# EAGLE board Input interface (EAGLE 7.1.0)
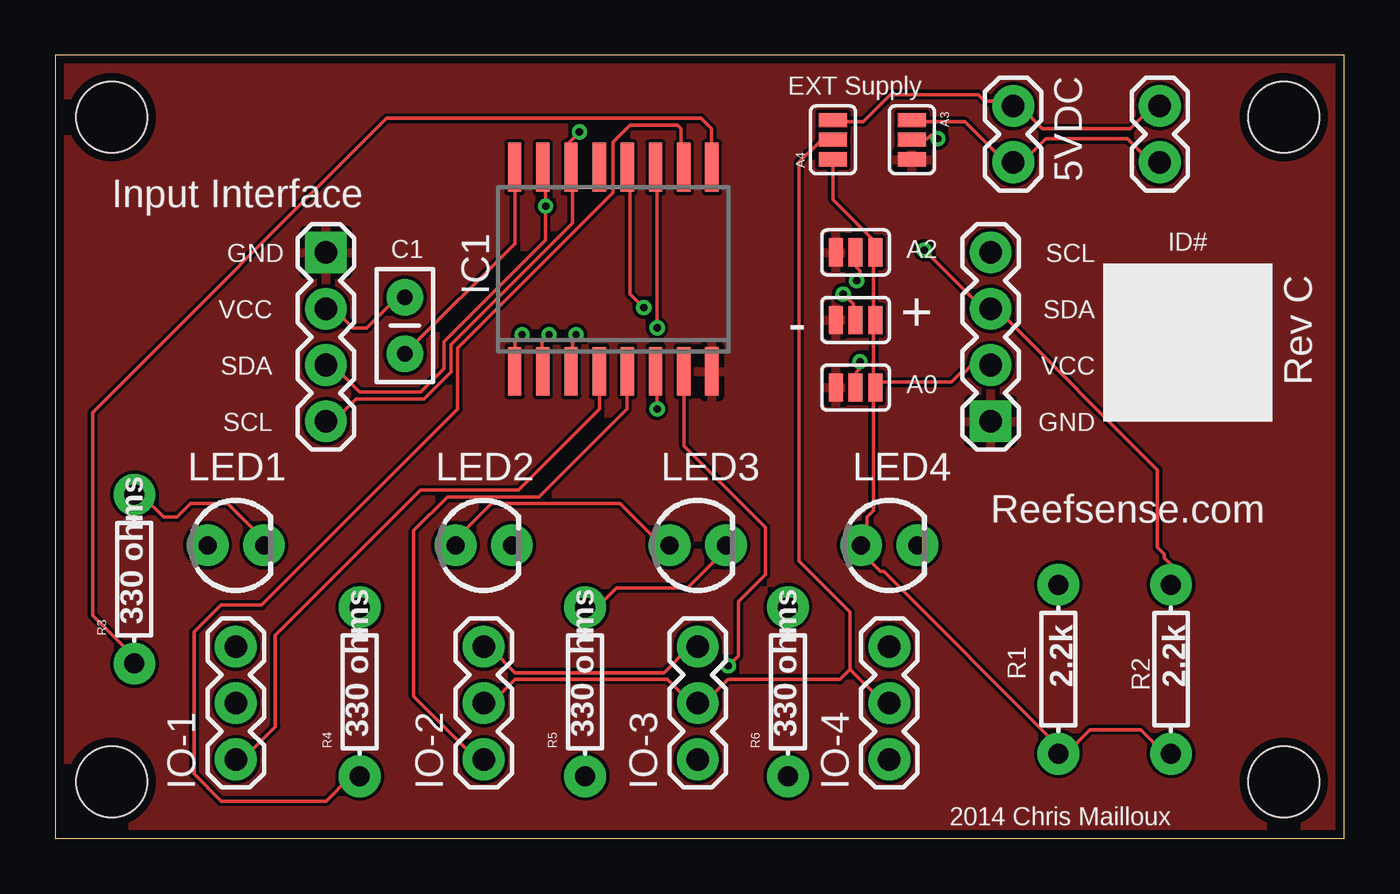
[diagram p0: board, top side]
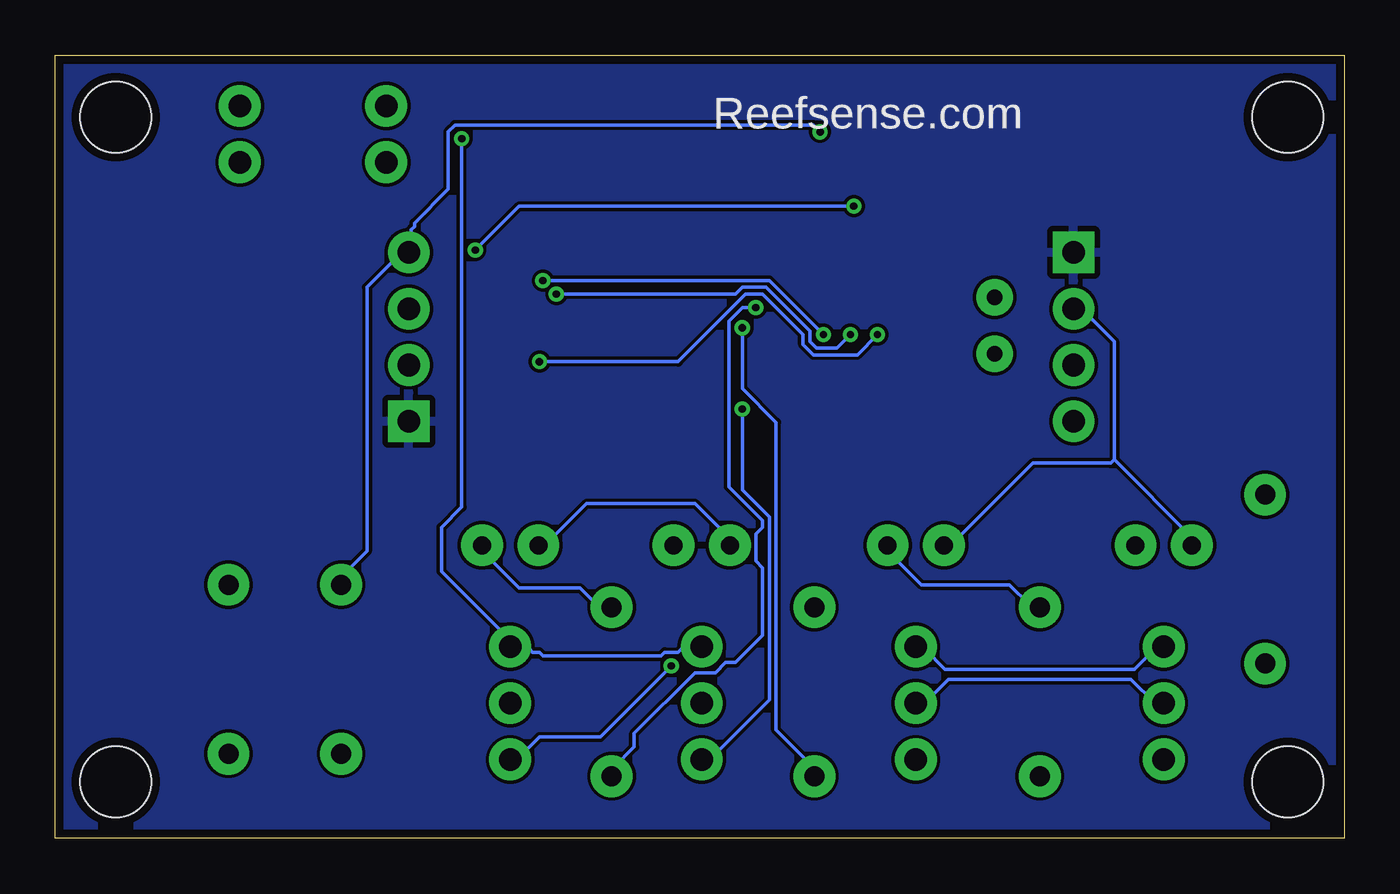
[diagram p1: board, bottom side, seen from below]

Size 58.09 x 35.3 mm. Coordinates in mm from the lower left corner, seen from the top.
Outline: 0,0 58.09,0 58.09,35.3 0,35.3 0,0
Copper layers (1*16): Top 0.0356mm / dielectric 1.5011mm / Bottom 0.0356mm
Design rules "LaenPCBOrder": minimum track width 6mil, minimum drill 13mil, track to track 6mil, track to pad 6mil, pad to pad 6mil, via to via 6mil, smd to smd 6mil, copper to edge 15mil, drill to drill 6mil, minimum pad ring 7mil, minimum via ring 7mil, stop-mask expansion 3mil, vias tented up to drill 0mil, thermal gap 10mil
Holes 3.2 mm at 2.54,32.51 55.37,32.51 55.37,2.54 2.54,2.54

## Footprints (pad centres in the part's own frame; a part is rotated, then mirrored left to right if it is on the bottom)
1X02 = drill 1.016 pad 1.88: 1 0,0; 2 2.54,0
SJ_3 = smd 0.635 x 1.27: 1 -0.889,0; 2 0,0; 3 0.889,0
CAP-PTH-SMALL2 = drill 0.7 pad 1.651: 1 0,0; 2 2.54,0
SO16W = smd 0.6 x 2.2: 1 -4.445,-4.6; 2 -3.175,-4.6; 3 -1.905,-4.6; 4 -0.635,-4.6; 5 0.635,-4.6; 6 1.905,-4.6; 7 3.175,-4.6; 8 4.445,-4.6; 9 4.445,4.6; 10 3.175,4.6; 11 1.905,4.6; 12 0.635,4.6; 13 -0.635,4.6; 14 -1.905,4.6; 15 -3.175,4.6; 16 -4.445,4.6
1X03 = drill 1.016 pad 1.88: 1 0,0; 2 2.54,0; 3 5.08,0
1X04 = drill 1.016 pad 1.88 square: 1 0,0 | drill 1.016 pad 1.88: 2 2.54,0; 3 5.08,0; 4 7.62,0
LED3MM = drill 0.813 pad 1.88: A -1.27,0; K 1.27,0
AXIAL-0.3 = drill 0.9 pad 1.88: P$1 -3.81,0; P$2 3.81,0

## Placement (x,y rotation side)
5VDC  +  [1X02]  43.18,33.02 270 top
5VDC1  +  [1X02]  49.78,33.02 270 top
A0  [SJ_3]  36.07,20.32 0 top
A1  [SJ_3]  36.07,23.37 0 top
A2  [SJ_3]  36.07,26.42 0 top
A3  [SJ_3]  38.61,31.5 270 top
A4  [SJ_3]  35.05,31.5 90 top
C1  [CAP-PTH-SMALL2]  15.75,24.38 270 top
IC1  PCF8574T  [SO16W]  25.15,25.65 0 top
IO-1  [1X03]  8.13,3.56 90 top
IO-2  [1X03]  19.3,3.56 90 top
IO-3  [1X03]  28.96,3.56 90 top
IO-4  [1X03]  37.59,3.56 90 top
JP1  [1X04]  12.19,26.42 270 top
JP2  [1X04]  42.16,18.8 90 top
LED1  [LED3MM]  8.13,13.21 0 top
LED2  [LED3MM]  19.3,13.21 0 top
LED3  [LED3MM]  28.96,13.21 0 top
LED4  [LED3MM]  37.59,13.21 0 top
R1  2.2k  [AXIAL-0.3]  45.21,7.62 270 top
R2  2.2k  [AXIAL-0.3]  50.29,7.62 270 top
R3  330 ohms  [AXIAL-0.3]  3.56,11.68 90 top
R4  330 ohms  [AXIAL-0.3]  13.72,6.6 90 top
R5  330 ohms  [AXIAL-0.3]  23.88,6.6 90 top
R6  330 ohms  [AXIAL-0.3]  33.02,6.6 90 top

## Library data of the parts
5VDC 5VDC1 IO-1-IO-4 JP1 JP2 = SparkFun-Connectors
A0 A1-A4 = SparkFun-Retired
C1 = SparkFun-Capacitors
IC1 = micro-philips
LED1-LED4 = SparkFun-LED
R1-R6 = SparkFun-Resistors

## Nets
5V: A0.3 A1.3 A2.3 A4.1 C1.1 JP1.2 JP2.2 LED1.A LED2.A LED3.A LED4.A R1.P$2 R2.P$2
GND: A0.1 A1.1 A2.1 A3.3 IC1.8 JP1.1 JP2.1
N$1: IC1.4 IO-1.1
N$2: IC1.5 IO-2.1
N$3: IC1.6 IO-3.1
N$4: A0.2 IC1.1
N$5: IC1.14 JP1.4 JP2.4 R1.P$1
N$6: IC1.15 JP1.3 JP2.3 R2.P$1
N$7: A1.2 IC1.2
N$8: C1.2 IC1.16
N$9: A2.2 IC1.3
N$10: IC1.7 IO-4.1
N$11: IC1.9 R3.P$1
N$12: IC1.10 R4.P$1
N$13: IC1.11 R5.P$1
N$14: IC1.12 R6.P$1
N$15: LED1.K R3.P$2
N$16: LED2.K R4.P$2
N$17: LED3.K R5.P$2
N$18: LED4.K R6.P$2
N$19: A4.2 IO-1.2 IO-2.2 IO-3.2 IO-4.2
N$20: 5VDC1.1 5VDC.1 A4.3
N$21: 5VDC1.2 5VDC.2 A3.1
N$22: A3.2 IO-1.3 IO-2.3 IO-3.3 IO-4.3

## Tracks (layer width: path | path; a pad name or v marks a point on that pad's centre or on a via)
5V
  Top 0.152: C1.1 15.39,24.38 14.02,23.01 13.41,23.01 12.65,23.77 12.19,23.77 JP1.2 | 36.88,20.57 36.88,23.32 A1.3 36.88,23.47 36.88,26.36 A2.3 36.88,26.52 36.88,26.98 35.05,28.8 A4.1 | 36.88,20.57 36.88,20.42 A0.3 | JP2.2 41.3,21.34 41,21.03 40.84,21.03 40.39,20.57 36.88,20.57 | 36.88,20.57 A0.3 | R2.P$2 49.99,3.81 48.92,4.88 46.63,4.88 45.57,3.81 R1.P$2 45.11,3.81 45.11,4.27 37.34,12.04 37.19,12.04 36.42,12.8 36.42,13.11 LED4.A 36.42,13.26 36.58,13.41 36.58,14.48 36.88,14.78 36.88,20.27 A0.3 | LED2.A 18.14,13.26 18.14,13.56 19.66,15.09 25.45,15.09 27.28,13.26 27.58,13.26 LED3.A
  Bottom 0.152: LED1.A 6.86,13.56 10.36,17.07 | 10.36,17.07 10.36,22.4 11.73,23.77 12.19,23.77 JP1.2 | 10.36,17.07 10.52,16.92 14.02,16.92 17.68,13.26 17.98,13.26 LED2.A | LED3.A 27.74,13.26 27.74,13.56 29.26,15.09 34.14,15.09 35.97,13.26 36.27,13.26 LED4.A
GND
  pour Top: -2.03,39.62 59.44,39.62 58.42,-1.52 -2.54,-1.02
  pour Bottom: -2.03,-1.02 58.42,-1.02 59.44,39.62 -2.54,39.12
N$1
  Top 0.152: IC1.4 24.54,21.03 24.54,19.36 20.88,15.7 16.46,15.7 9.91,9.14 9.91,5.03 8.53,3.66 8.23,3.66 IO-1.1
N$2
  Top 0.152: IC1.5 25.76,21.03 25.76,19.36 21.79,15.39 17.68,15.39 16.15,13.87 16.15,6.4 18.9,3.66 19.2,3.66 IO-2.1
N$3  (via drill 0.33)
  Top 0.152: v27.13,19.36 27.13,21.03 IC1.6
  Bottom 0.152: v27.13,19.36 27.13,15.7 25.91,14.48 25.91,6.25 28.5,3.66 28.96,3.66 IO-3.1
N$4  (via drill 0.33)
  Top 0.152: v36.27,21.49 36.27,21.18 36.12,21.03 36.12,20.42 A0.2 | v21.03,22.71 20.73,22.4 20.73,21.18 IC1.1
  Bottom 0.152: v36.27,21.49 30.02,21.49 26.98,24.54 26.21,24.54 24.38,22.71 24.38,22.25 23.93,21.79 21.95,21.79 v21.03,22.71
N$5  (via drill 0.33)
  Top 0.152: JP1.4 12.19,18.9 12.65,18.9 13.56,19.81 16.61,19.81 17.83,21.03 17.83,22.25 23.32,27.74 23.32,30.18 IC1.14 23.16,30.33 23.16,31.39 v23.62,31.85
  Bottom 0.152: R1.P$1 45.11,11.43 45.11,11.89 44.04,12.95 44.04,24.84 42.52,26.36 42.22,26.36 JP2.4 42.06,26.52 42.06,27.43 41.91,27.58 41.91,27.74 40.39,29.26 40.39,31.85 40.08,32.16 23.93,32.16 v23.62,31.85
N$6  (via drill 0.33)
  Top 0.152: JP1.3 12.5,21.34 13.72,20.12 16.46,20.12 17.53,21.18 17.53,22.4 22.1,26.98 v22.1,28.5 22.1,30.18 IC1.15 | R2.P$1 50.29,12.34 49.99,12.65 49.99,12.8 49.68,13.11 49.68,16.61 42.52,23.77 42.22,23.77 JP2.3 42.06,23.93 41.76,23.93 v39.17,26.52
  Bottom 0.152: v22.1,28.5 37.19,28.5 v39.17,26.52
N$7  (via drill 0.33)
  Top 0.152: v35.51,24.54 35.97,24.08 35.97,23.47 A1.2 | v22.25,22.71 21.95,22.4 21.95,21.18 IC1.2
  Bottom 0.152: v35.51,24.54 27.43,24.54 27.13,24.84 26.06,24.84 24.08,22.86 24.08,22.4 23.77,22.1 22.86,22.1 v22.25,22.71
N$8
  Top 0.152: C1.2 20.73,26.82 20.73,30.18 IC1.16
N$9  (via drill 0.33)
  Top 0.152: v36.12,25.15 36.27,25.3 36.27,25.6 36.12,25.76 36.12,26.36 A2.2 | v23.47,22.71 23.47,22.55 23.32,22.4 23.32,21.18 IC1.3
  Bottom 0.152: v36.12,25.15 25.91,25.15 v23.47,22.71
N$10  (via drill 0.33)
  Top 0.152: v30.33,7.77 30.79,8.23 30.79,10.67 32,11.89 32,14.02 28.35,17.68 28.35,21.03 IC1.7
  Bottom 0.152: v30.33,7.77 33.53,4.57 36.27,4.57 37.19,3.66 37.49,3.66 IO-4.1
N$11
  Top 0.152: IC1.9 29.57,30.33 29.57,32 29.11,32.46 14.94,32.46 1.68,19.2 1.68,10.06 3.5,8.23 3.5,7.92 R3.P$1
N$12
  Top 0.152: IC1.10 28.19,30.33 28.19,32 28.04,32.16 25.91,32.16 25.15,31.39 25.15,29.11 18.14,22.1 18.14,19.36 9.3,10.52 7.47,10.52 6.25,9.3 6.25,2.9 7.47,1.68 12.19,1.68 13.26,2.74 13.72,2.74 R4.P$1
N$13  (via drill 0.33)
  Top 0.152: v27.13,23.01 27.13,30.18 IC1.11
  Bottom 0.152: v27.13,23.01 27.13,20.27 25.6,18.75 25.6,4.88 23.93,3.2 23.93,2.9 R5.P$1
N$14  (via drill 0.33)
  Top 0.152: v26.52,23.93 25.91,24.54 25.91,30.18 IC1.12
  Bottom 0.152: v26.52,23.93 27.13,23.93 27.74,23.32 27.74,15.85 26.21,14.33 26.21,14.02 26.52,13.72 26.52,12.5 26.21,12.19 26.21,9.14 27.43,7.92 27.89,7.92 28.35,7.47 29.26,7.47 32,4.72 32,4.12 32.92,3.2 32.92,2.9 R6.P$1
N$15
  Top 0.152: R3.P$2 3.66,15.39 3.96,15.39 4.88,14.48 5.49,14.48 6.1,15.09 7.77,15.09 9.3,13.56 9.3,13.26 LED1.K
N$16
  Bottom 0.152: LED2.K 20.57,12.95 19.05,11.43 15.09,11.43 14.17,10.52 13.72,10.52 R4.P$2
N$17
  Top 0.152: R5.P$2 23.93,10.52 24.54,10.52 25.3,11.28 28.5,11.28 30.33,13.11 LED3.K
N$18
  Bottom 0.152: LED4.K 38.86,12.95 37.19,11.28 34.44,11.28 33.68,10.52 33.07,10.52 R6.P$2
N$19
  Top 0.152: 35.81,7.62 35.81,10.21 33.53,12.5 33.53,30.48 34.44,31.39 35.05,31.39 A4.2 | 35.81,7.62 37.34,6.1 IO-4.2 | 35.81,7.62 35.36,7.16 30.33,7.16 29.26,6.1 IO-3.2 28.65,6.1 27.58,7.16 20.73,7.16 19.66,6.1 IO-2.2
  Bottom 0.152: IO-1.2 8.53,6.1 9.6,7.16 17.83,7.16 18.9,6.1 IO-2.2
N$20
  Top 0.152: A4.3 35.05,32.31 36.42,32.31 37.64,33.53 41.6,33.53 41.91,33.22 42.98,33.22 5VDC.1 43.28,32.92 43.59,32.92 44.5,32 48.46,32 49.38,32.92 49.68,32.92 5VDC1.1
N$21
  Top 0.152: A3.1 38.71,32.31 41,32.31 42.82,30.48 5VDC.2 43.59,30.48 44.65,31.55 48.31,31.55 49.38,30.48 5VDC1.2
N$22  (via drill 0.33)
  Top 0.152: v39.78,31.55 39.62,31.7 39.47,31.7 39.32,31.55 38.71,31.55 A3.2 | IO-2.3 19.36,8.53 19.66,8.53 20.73,7.47 27.43,7.47 28.5,8.53 28.96,8.53 IO-3.3
  Bottom 0.152: IO-1.3 8.23,8.53 8.53,8.53 9.45,7.62 17.98,7.62 18.9,8.53 19.2,8.53 IO-2.3 | v39.78,31.55 39.78,14.94 40.69,14.02 40.69,12.04 37.64,8.99 37.64,8.69 IO-4.3 37.49,8.53 36.73,8.53 36.58,8.38 36.27,8.38 36.12,8.23 30.79,8.23 30.63,8.38 30.02,8.38 29.87,8.53 28.96,8.53 IO-3.3

## Text on the board
tNames: EXT Supply | Input Interface | GND | SCL | ID# | Rev C | VCC | SDA | + | SDA | - | VCC | SCL | GND | Reefsense.com | 2014 Chris Mailloux
bNames: Reefsense.com